# Altium PCB PMDC_power.PcbDoc
Units mil, origin at the board's own origin, x right, y up, seen from the top; angles counter-clockwise.
Board outline 6000 x 4000 mil, 2 copper layers (Top Layer, Bottom Layer); 40 components, 0 nets, 128 pads, 0 vias.
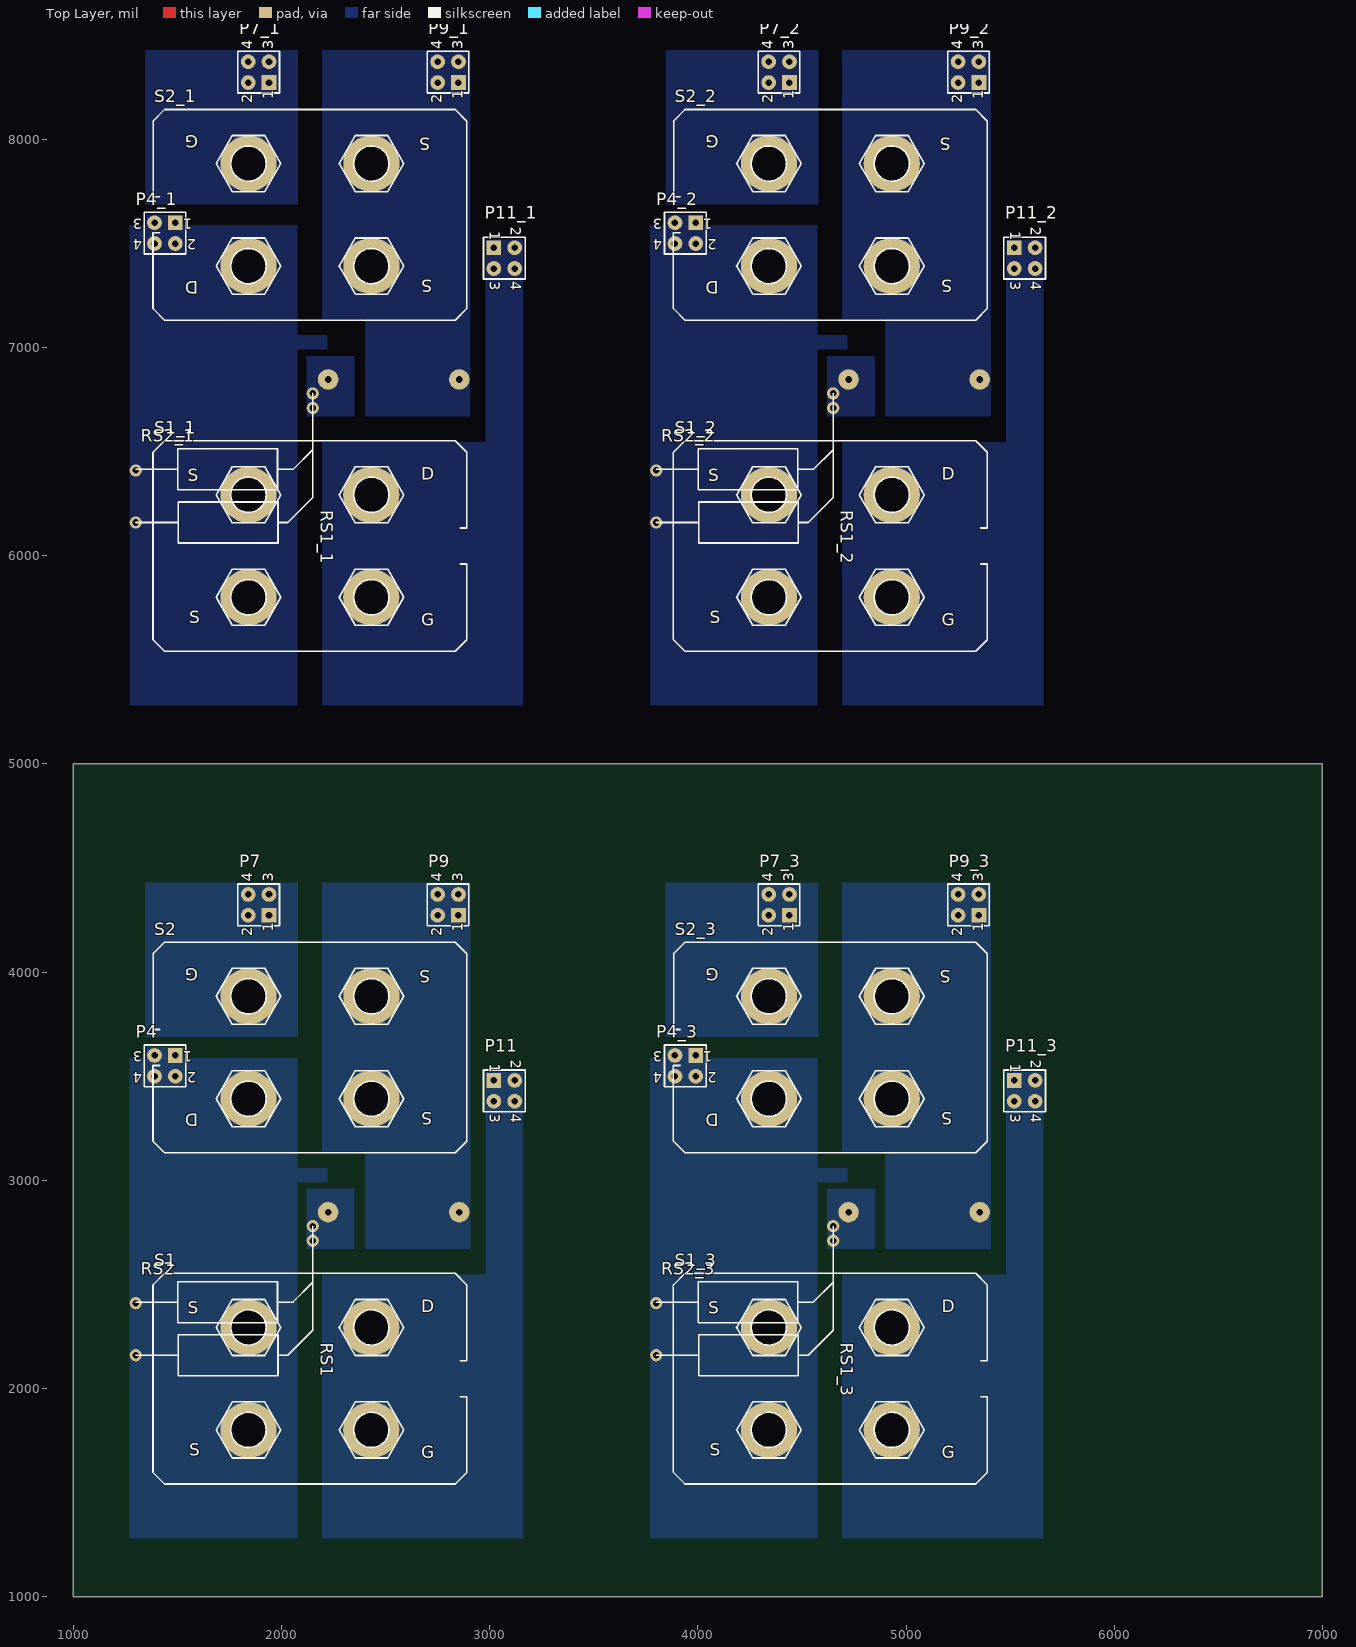
[diagram p0: Top Layer view]
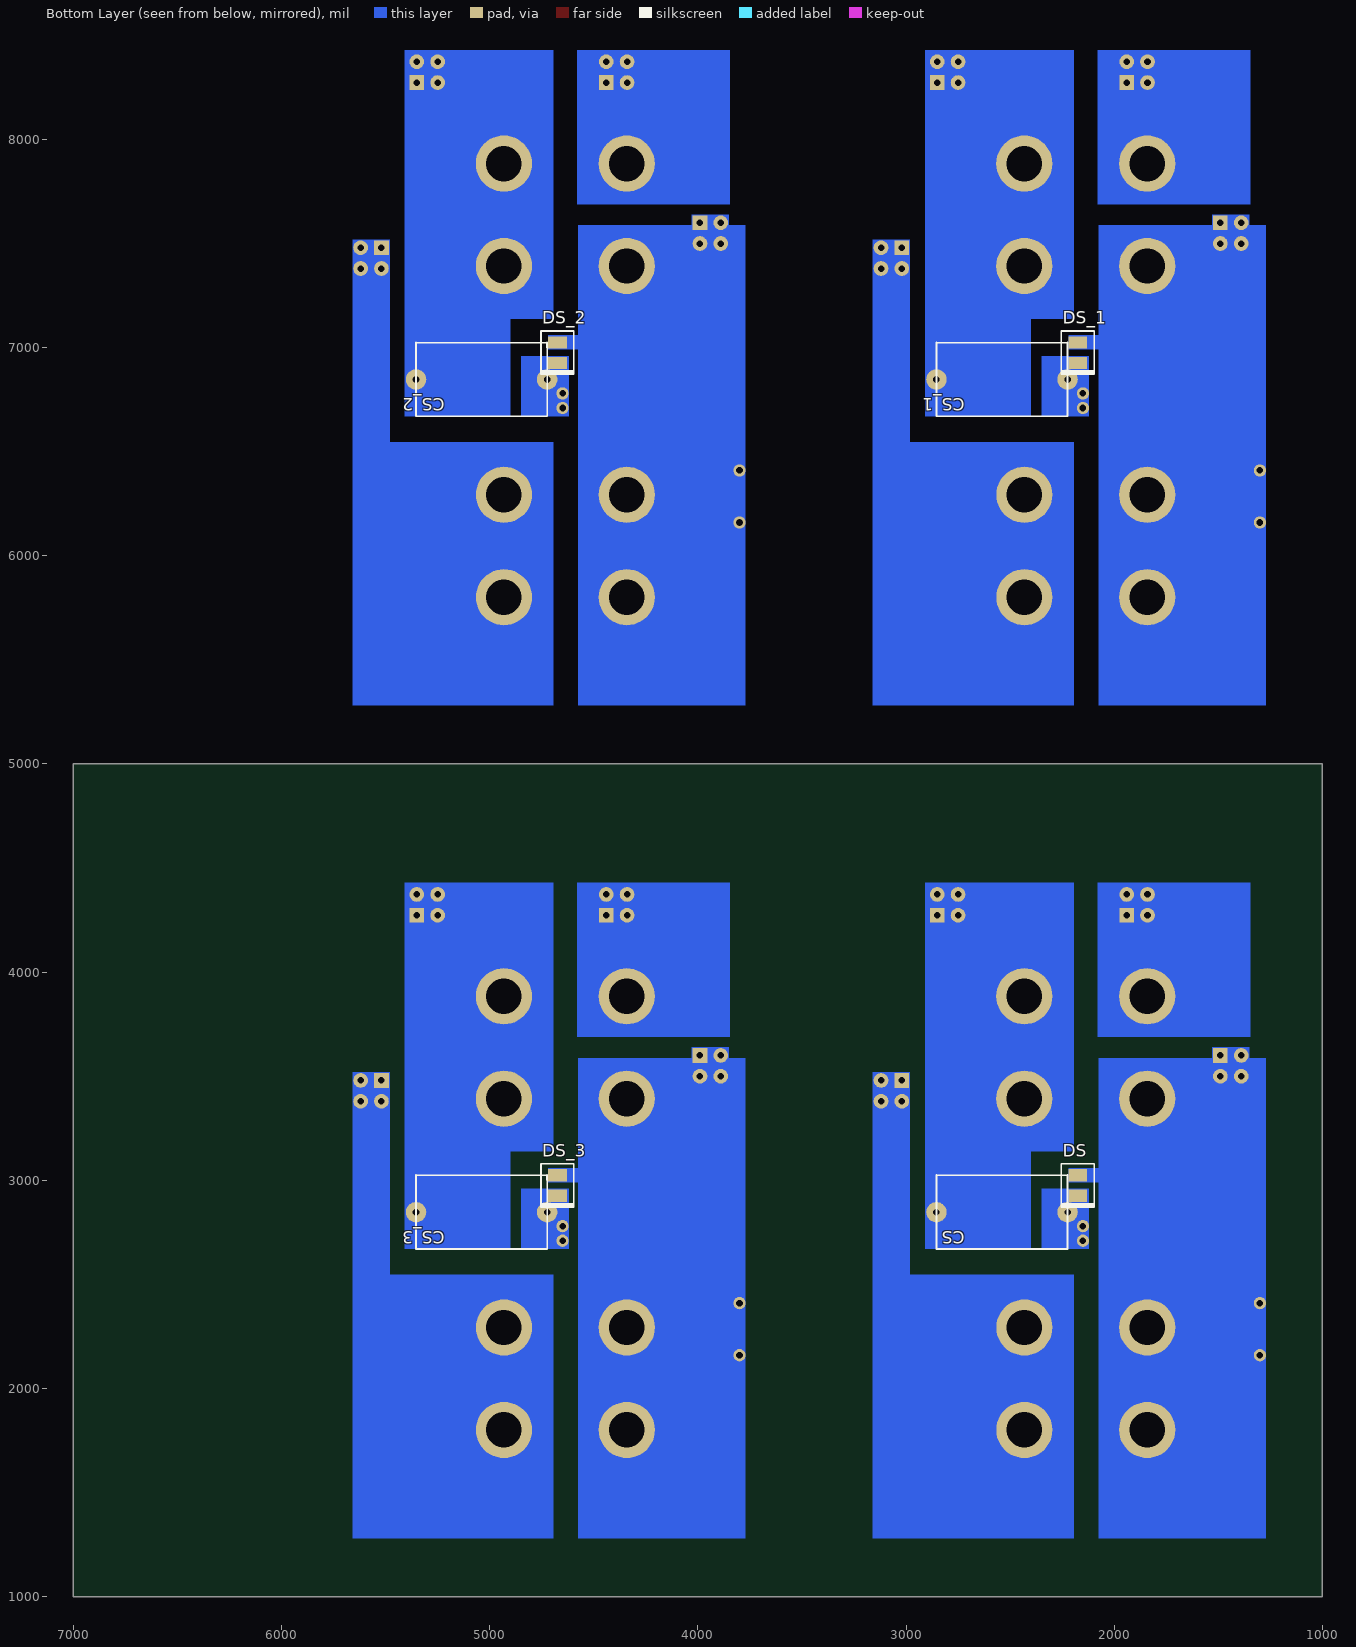
[diagram p1: Bottom Layer view, seen from below]

## Layer stack, top to bottom
Top Layer: signal copper 1.4
Dielectric: dielectric 12.6, FR-4, Dk 4.8
Bottom Layer: signal copper 1.4

## Board outline
1000,1000 7000,1000 7000,5000 1000,5000

## Design rules (kind name [scope] priority, off if disabled: settings)
Clearance [All] p1: gap=10
PolygonConnect [All] p1: connectstyle=Relief reliefconductorwidth=10 reliefentries=4 polygonreliefangle="90 Angle"
RoutingVias [All] p1: holewidth=28 width=50 viastyle="Through Hole" minholewidth=28 minwidth=50 maxholewidth=28 maxwidth=50
SilkscreenOverComponentPads [IsPad] p1: minsilkscreentomaskgap=10
SolderMaskExpansion [All] p1: expansion=4
Width [All] p1: maxlimit=10 minlimit=10 preferedwidth=10
27 further rules are at their usual default settings.

## Components (designator, comment, footprint, x,y, rotation, side; value= is the part's Value field where it differs from the comment)
CS "Cap" "CAPACITOR 4U7 100V" 2853.92,3339.13 r180 bottom
CS_1 "Cap" "CAPACITOR 4U7 100V" 2853.92,7339.13 r180 bottom (schematic designator CS)
CS_2 "Cap" "CAPACITOR 4U7 100V" 5353.92,7339.13 r180 bottom (schematic designator CS)
CS_3 "Cap" "CAPACITOR 4U7 100V" 5353.92,3339.13 r180 bottom (schematic designator CS)
DS "BYD77" SOD87 2175,2975.66 r270 bottom
DS_1 "BYD77" SOD87 2175,6975.66 r270 bottom (schematic designator DS)
DS_2 "BYD77" SOD87 4675,6975.66 r270 bottom (schematic designator DS)
DS_3 "BYD77" SOD87 4675,2975.66 r270 bottom (schematic designator DS)
P4 "Header 2X2" HDR2X2 1490,3600 r180 top
P4_1 "Header 2X2" HDR2X2 1490,7600 r180 top (schematic designator P4)
P4_2 "Header 2X2" HDR2X2 3990,7600 r180 top (schematic designator P4)
P4_3 "Header 2X2" HDR2X2 3990,3600 r180 top (schematic designator P4)
P7 "Header 2X2" HDR2X2 1940,4273.32 r90 top
P7_1 "Header 2X2" HDR2X2 1940,8273.32 r90 top (schematic designator P7)
P7_2 "Header 2X2" HDR2X2 4440,8273.32 r90 top (schematic designator P7)
P7_3 "Header 2X2" HDR2X2 4440,4273.32 r90 top (schematic designator P7)
P9 "Header 2X2" HDR2X2 2850,4273.32 r90 top
P9_1 "Header 2X2" HDR2X2 2850,8273.32 r90 top (schematic designator P9)
P9_2 "Header 2X2" HDR2X2 5350,8273.32 r90 top (schematic designator P9)
P9_3 "Header 2X2" HDR2X2 5350,4273.32 r90 top (schematic designator P9)
P11 "Header 2X2" HDR2X2 3020,3480 r270 top
P11_1 "Header 2X2" HDR2X2 3020,7480 r270 top (schematic designator P11)
P11_2 "Header 2X2" HDR2X2 5520,7480 r270 top (schematic designator P11)
P11_3 "Header 2X2" HDR2X2 5520,3480 r270 top (schematic designator P11)
RS1 "Res1" "Axial 0.8"#1 2137.4,2160 r180 top
RS1_1 "Res1" "Axial 0.8"#1 2137.4,6160 r180 top (schematic designator RS1)
RS1_2 "Res1" "Axial 0.8"#1 4637.4,6160 r180 top (schematic designator RS1)
RS1_3 "Res1" "Axial 0.8"#1 4637.4,2160 r180 top (schematic designator RS1)
RS2 "Res1" "Axial 0.8"#2 2135,2415 r180 top
RS2_1 "Res1" "Axial 0.8"#2 2135,6415 r180 top (schematic designator RS2)
RS2_2 "Res1" "Axial 0.8"#2 4635,6415 r180 top (schematic designator RS2)
RS2_3 "Res1" "Axial 0.8"#2 4635,2415 r180 top (schematic designator RS2)
S1 "IXFN420N10T" SOT-227B 2136.51,2047 r0 top
S1_1 "IXFN420N10T" SOT-227B 2136.51,6047 r0 top (schematic designator S1)
S1_2 "IXFN420N10T" SOT-227B 4636.51,6047 r0 top (schematic designator S1)
S1_3 "IXFN420N10T" SOT-227B 4636.51,2047 r0 top (schematic designator S1)
S2 "IXFN420N10T" SOT-227B 2136.51,3638 r180 top
S2_1 "IXFN420N10T" SOT-227B 2136.51,7638 r180 top (schematic designator S2)
S2_2 "IXFN420N10T" SOT-227B 4636.51,7638 r180 top (schematic designator S2)
S2_3 "IXFN420N10T" SOT-227B 4636.51,3638 r180 top (schematic designator S2)

## Footprints (in the part's own frame and the unit in brackets; to place one, negate y for a bottom-side part, rotate by r counter-clockwise, add the part's x,y. Pads: shape width x height; smd on the part's side, far side on the other; paste and mask are expansions set on the pad)
"Axial 0.8"#1 [mm]
  round 1.5 hole 0.8: 1(-0.32,-13.97) 2(21.27,0)
  silkscreen extent -0.32,-15.75 21.27,2.5
"Axial 0.8"#2 [mm]
  round 1.5 hole 0.8: 1(-0.381,-9.271) 2(21.209,0.127)
  silkscreen extent -0.38,-7.49 21.21,2.5
"CAPACITOR 4U7 100V" [mm]
  round 2.5 hole 0.8: 1(0,-12.5) 2(16,-12.5)
  silkscreen extent 0,-17 16,-8
HDR2X2 [mm] "Connector; Header; 2x2 Position"
  rect 1.8x1.8 hole 0.8: 1(0,0)
  round 1.8 hole 0.8: 2(0,2.54) 3(2.54,0) 4(2.54,2.54)
  silkscreen extent -1.27,-1.27 3.81,3.81
SOD87 [mm]
  rect 1.5x2.3 smd: A(-1.253,0) K(1.253,0)
  silkscreen extent -2.65,-2.01 2.65,2.01
SOT-227B [mil] "SOT-227; 4 Screw Terminals, 2 Mounting Holes"
  round 270 hole 170 unplated: 1(-295.21,-246) 1(-295.21,246) 2(295,-246) 3(295,246)
  silkscreen extent -754,-506 754,506

## Part data
CS CS_1 CS_2 CS_3: "Capacitor"
DS DS_1 DS_2 DS_3: library part Diode, "Default Diode"
P4 P4_1 P4_2 P4_3 P7 P7_1 P7_2 P7_3 P9 P9_1 P9_2 P9_3 P11 P11_1 P11_2 P11_3: "Header, 2-Pin, Dual row"
RS1 RS1_1 RS1_2 RS1_3 RS2 RS2_1 RS2_2 RS2_3: "Resistor"
S1 S1_1 S1_2 S1_3 S2 S2_1 S2_2 S2_3: library part MOSFET-N, "N-Channel MOSFET"

## Nets (pads, with @x,y where several pads share a name; then routed paths per layer and width w, separated by ;. In a path a pad name is that pad's centre, name@x,y a point inside that pad or via, vN(x,y) a via of type N, cw(c..) or ccw(c..) an arc to the next point about the centre after c; other vN are vias at no path point)
pads on no net: CS.1 CS.2 CS_1.1 CS_1.2 CS_2.1 CS_2.2 CS_3.1 CS_3.2 DS.A DS.K DS_1.A DS_1.K DS_2.A DS_2.K DS_3.A DS_3.K P4.1 P4.2 P4.3 P4.4 P4_1.1 P4_1.2 P4_1.3 P4_1.4 P4_2.1 P4_2.2 P4_2.3 P4_2.4 P4_3.1 P4_3.2 P4_3.3 P4_3.4 P7.1 P7.2 P7.3 P7.4 P7_1.1 P7_1.2 P7_1.3 P7_1.4 P7_2.1 P7_2.2 P7_2.3 P7_2.4 P7_3.1 P7_3.2 P7_3.3 P7_3.4 P9.1 P9.2 P9.3 P9.4 P9_1.1 P9_1.2 P9_1.3 P9_1.4 P9_2.1 P9_2.2 P9_2.3 P9_2.4 P9_3.1 P9_3.2 P9_3.3 P9_3.4 P11.1 P11.2 P11.3 P11.4 P11_1.1 P11_1.2 P11_1.3 P11_1.4 P11_2.1 P11_2.2 P11_2.3 P11_2.4 P11_3.1 P11_3.2 P11_3.3 P11_3.4 RS1.1 RS1.2 RS1_1.1 RS1_1.2 RS1_2.1 RS1_2.2 RS1_3.1 RS1_3.2 RS2.1 RS2.2 RS2_1.1 RS2_1.2 RS2_2.1 RS2_2.2 RS2_3.1 RS2_3.2 S1.1 S1.2 S1.3 S1_1.1 S1_1.2 S1_1.3 S1_2.1 S1_2.2 S1_2.3 S1_3.1 S1_3.2 S1_3.3 S2.1 S2.2 S2.3 S2_1.1 S2_1.2 S2_1.3 S2_2.1 S2_2.2 S2_2.3 S2_3.1 S2_3.2 S2_3.3
copper on no net: | length 2328.4
  Bottom Layer w50: 1841.51,3088.49 1997,2933 ; 1841.51,7088.49 1997,6933 ; 3020,3380 3110,3380 ; 3020,7380 3110,7380 ; 4341.51,3088.49 4497,2933 ; 4341.51,7088.49 4497,6933 ; 5520,3380 5610,3380 ; 5520,7380 5610,7380
  Bottom Layer w60: 1841.51,3190.49 2034,2998 ; 1841.51,7190.49 2034,6998 ; 4341.51,3190.49 4534,2998 ; 4341.51,7190.49 4534,6998

## Other copper
Bottom Layer:
  rectangle: 4620,2670 4850,2960
  rectangle: 4900,2670 5408,3155
  rectangle: 4470,2990 4720,3060
  region: 4693.6,4430 4693.6,3138 5408,3138 5408,4430
  region: 4693.6,2547 4693.6,1280 5636,1280 5636,2547
  region: 3770,3588 3770,1280 4575.83,1280 4575.83,3588
  region: 4579.43,3688 4579.43,4430 3845,4430 3845,3688
  rectangle: 3850,3460 4030,3640
  rectangle: 3920,3460 4180,3588
  rectangle: 5480,1280 5660,3520
  rectangle: 4620,6670 4850,6960
  rectangle: 4900,6670 5408,7155
  rectangle: 4470,6990 4720,7060
  region: 4693.6,8430 4693.6,7138 5408,7138 5408,8430
  region: 4693.6,6547 4693.6,5280 5636,5280 5636,6547
  region: 3770,7588 3770,5280 4575.83,5280 4575.83,7588
  region: 4579.43,7688 4579.43,8430 3845,8430 3845,7688
  rectangle: 3850,7460 4030,7640
  rectangle: 3920,7460 4180,7588
  rectangle: 5480,5280 5660,7520
  rectangle: 2120,6670 2350,6960
  rectangle: 2400,6670 2908,7155
  rectangle: 1970,6990 2220,7060
  region: 2193.6,8430 2193.6,7138 2908,7138 2908,8430
  region: 2193.6,6547 2193.6,5280 3136,5280 3136,6547
  region: 1270,7588 1270,5280 2075.83,5280 2075.83,7588
  region: 2079.43,7688 2079.43,8430 1345,8430 1345,7688
  rectangle: 1350,7460 1530,7640
  rectangle: 1420,7460 1680,7588
  rectangle: 2980,5280 3160,7520
  rectangle: 2980,1280 3160,3520
  rectangle: 1420,3460 1680,3588
  rectangle: 1350,3460 1530,3640
  region: 2079.43,3688 2079.43,4430 1345,4430 1345,3688
  region: 1270,3588 1270,1280 2075.83,1280 2075.83,3588
  region: 2193.6,2547 2193.6,1280 3136,1280 3136,2547
  region: 2193.6,4430 2193.6,3138 2908,3138 2908,4430
  rectangle: 1970,2990 2220,3060
  rectangle: 2400,2670 2908,3155
  rectangle: 2120,2670 2350,2960

## Silkscreen, mask and mechanical layers (free items; w line width, h text height)
Mechanical 1:
  lines w10: 1234,1240 1234,4633 ; 1234,5240 1234,8633 ; 1240,1238 3200,1238 ; 1240,4637 3200,4637 ; 1240,5238 3200,5238 ; 1240,8637 3200,8637 ; 3194,1240 3194,4633 ; 3194,5240 3194,8633 ; 3734,1240 3734,4633 ; 3734,5240 3734,8633 ; 3740,1238 5700,1238 ; 3740,4637 5700,4637 ; 3740,5238 5700,5238 ; 3740,8637 5700,8637 ; 5694,1240 5694,4633 ; 5694,5240 5694,8633

## Text inside footprints (layer, text, board x,y; h text height)
P4: Top Overlay "1" at 1570,3620 h50 r180; Top Overlay "2" at 1590,3520 h50 r180; Top Overlay "4" at 1330,3520 h50 r180; Top Overlay "3" at 1330,3620 h50 r180
P4_1: Top Overlay "1" at 1570,7620 h50 r180; Top Overlay "2" at 1590,7520 h50 r180; Top Overlay "4" at 1330,7520 h50 r180; Top Overlay "3" at 1330,7620 h50 r180
P4_2: Top Overlay "1" at 4070,7620 h50 r180; Top Overlay "2" at 4090,7520 h50 r180; Top Overlay "4" at 3830,7520 h50 r180; Top Overlay "3" at 3830,7620 h50 r180
P4_3: Top Overlay "1" at 4070,3620 h50 r180; Top Overlay "2" at 4090,3520 h50 r180; Top Overlay "4" at 3830,3520 h50 r180; Top Overlay "3" at 3830,3620 h50 r180
P7: Top Overlay "1" at 1960,4193.32 h50 r90; Top Overlay "2" at 1860,4173.32 h50 r90; Top Overlay "4" at 1860,4433.32 h50 r90; Top Overlay "3" at 1960,4433.32 h50 r90
P7_1: Top Overlay "1" at 1960,8193.32 h50 r90; Top Overlay "2" at 1860,8173.32 h50 r90; Top Overlay "4" at 1860,8433.32 h50 r90; Top Overlay "3" at 1960,8433.32 h50 r90
P7_2: Top Overlay "1" at 4460,8193.32 h50 r90; Top Overlay "2" at 4360,8173.32 h50 r90; Top Overlay "4" at 4360,8433.32 h50 r90; Top Overlay "3" at 4460,8433.32 h50 r90
P7_3: Top Overlay "1" at 4460,4193.32 h50 r90; Top Overlay "2" at 4360,4173.32 h50 r90; Top Overlay "4" at 4360,4433.32 h50 r90; Top Overlay "3" at 4460,4433.32 h50 r90
P9: Top Overlay "1" at 2870,4193.32 h50 r90; Top Overlay "2" at 2770,4173.32 h50 r90; Top Overlay "4" at 2770,4433.32 h50 r90; Top Overlay "3" at 2870,4433.32 h50 r90
P9_1: Top Overlay "1" at 2870,8193.32 h50 r90; Top Overlay "2" at 2770,8173.32 h50 r90; Top Overlay "4" at 2770,8433.32 h50 r90; Top Overlay "3" at 2870,8433.32 h50 r90
P9_2: Top Overlay "1" at 5370,8193.32 h50 r90; Top Overlay "2" at 5270,8173.32 h50 r90; Top Overlay "4" at 5270,8433.32 h50 r90; Top Overlay "3" at 5370,8433.32 h50 r90
P9_3: Top Overlay "1" at 5370,4193.32 h50 r90; Top Overlay "2" at 5270,4173.32 h50 r90; Top Overlay "4" at 5270,4433.32 h50 r90; Top Overlay "3" at 5370,4433.32 h50 r90
P11: Top Overlay "1" at 3000,3560 h50 r270; Top Overlay "2" at 3100,3580 h50 r270; Top Overlay "4" at 3100,3320 h50 r270; Top Overlay "3" at 3000,3320 h50 r270
P11_1: Top Overlay "1" at 3000,7560 h50 r270; Top Overlay "2" at 3100,7580 h50 r270; Top Overlay "4" at 3100,7320 h50 r270; Top Overlay "3" at 3000,7320 h50 r270
P11_2: Top Overlay "1" at 5500,7560 h50 r270; Top Overlay "2" at 5600,7580 h50 r270; Top Overlay "4" at 5600,7320 h50 r270; Top Overlay "3" at 5500,7320 h50 r270
P11_3: Top Overlay "1" at 5500,3560 h50 r270; Top Overlay "2" at 5600,3580 h50 r270; Top Overlay "4" at 5600,3320 h50 r270; Top Overlay "3" at 5500,3320 h50 r270
S1: Top Overlay "S" at 1557.77,1676.92 h59.05; Top Overlay "G" at 2671.95,1665.11 h59.05; Top Overlay "D" at 2671.95,2365.9 h59.05; Top Overlay "S" at 1549.9,2358.02 h59.05
S1_1: Top Overlay "S" at 1557.77,5676.92 h59.05; Top Overlay "G" at 2671.95,5665.11 h59.05; Top Overlay "D" at 2671.95,6365.9 h59.05; Top Overlay "S" at 1549.9,6358.02 h59.05
S1_2: Top Overlay "S" at 4057.77,5676.92 h59.05; Top Overlay "G" at 5171.94,5665.11 h59.05; Top Overlay "D" at 5171.94,6365.9 h59.05; Top Overlay "S" at 4049.9,6358.02 h59.05
S1_3: Top Overlay "S" at 4057.77,1676.92 h59.05; Top Overlay "G" at 5171.94,1665.11 h59.05; Top Overlay "D" at 5171.94,2365.9 h59.05; Top Overlay "S" at 4049.9,2358.02 h59.05
S2: Top Overlay "S" at 2715.25,4008.08 h59.05 r180; Top Overlay "G" at 1601.08,4019.89 h59.05 r180; Top Overlay "D" at 1601.08,3319.1 h59.05 r180; Top Overlay "S" at 2723.13,3326.97 h59.05 r180
S2_1: Top Overlay "S" at 2715.25,8008.08 h59.05 r180; Top Overlay "G" at 1601.08,8019.89 h59.05 r180; Top Overlay "D" at 1601.08,7319.1 h59.05 r180; Top Overlay "S" at 2723.13,7326.98 h59.05 r180
S2_2: Top Overlay "S" at 5215.25,8008.08 h59.05 r180; Top Overlay "G" at 4101.08,8019.89 h59.05 r180; Top Overlay "D" at 4101.08,7319.1 h59.05 r180; Top Overlay "S" at 5223.13,7326.98 h59.05 r180
S2_3: Top Overlay "S" at 5215.25,4008.08 h59.05 r180; Top Overlay "G" at 4101.08,4019.89 h59.05 r180; Top Overlay "D" at 4101.08,3319.1 h59.05 r180; Top Overlay "S" at 5223.13,3326.97 h59.05 r180